# Altium PCB WIZARD_100V.PcbDoc
Units mil, origin at the board's own origin, x right, y up, seen from the top; angles counter-clockwise.
Board outline 3850 x 4000 mil, 2 copper layers (Top Layer, Bottom Layer); 59 components, 36 nets, 171 pads, 26 vias.
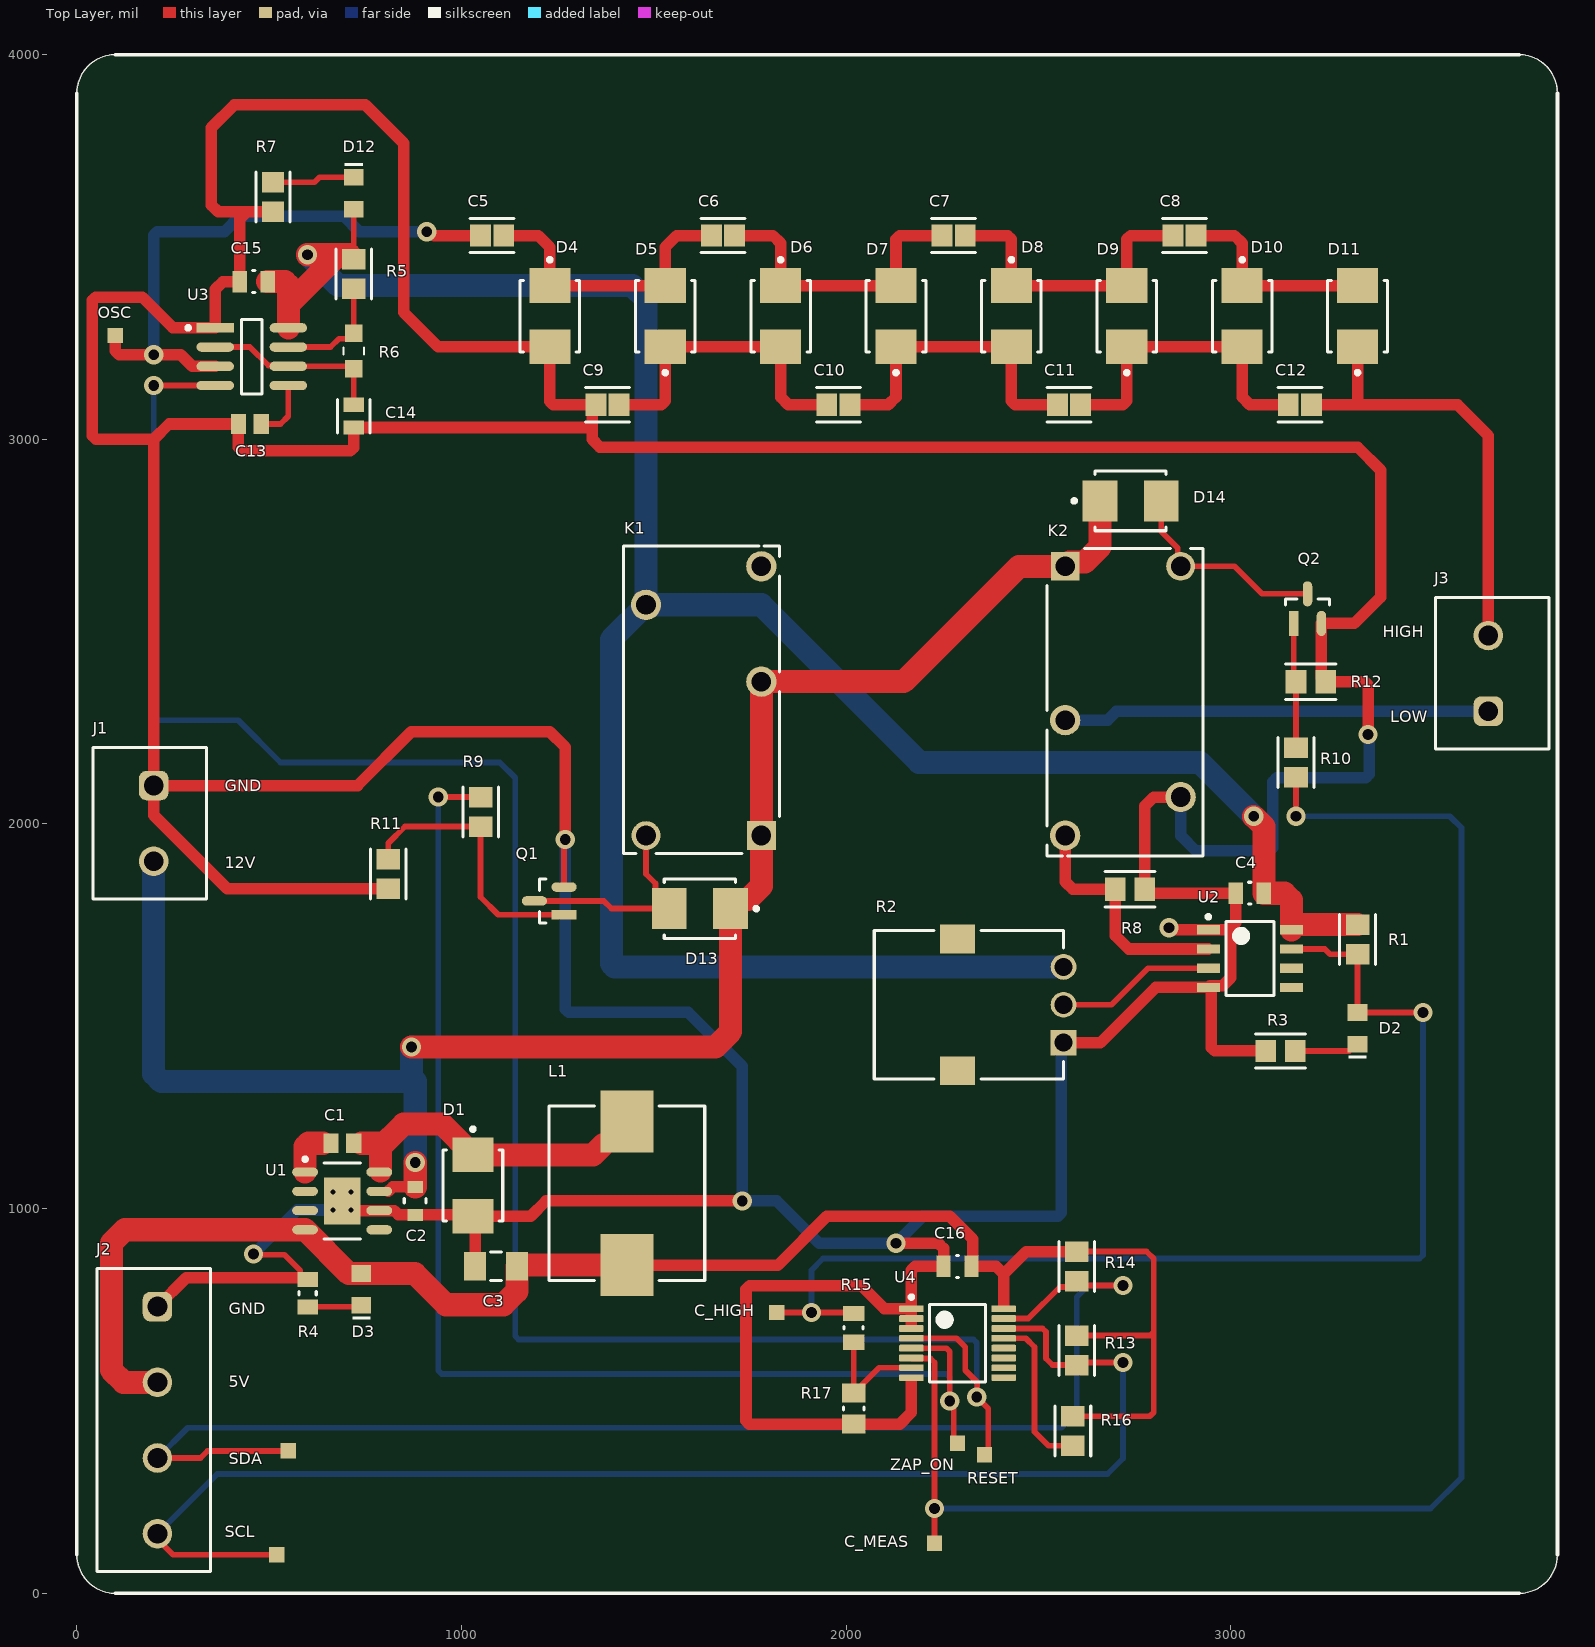
[diagram p0: Top Layer view]
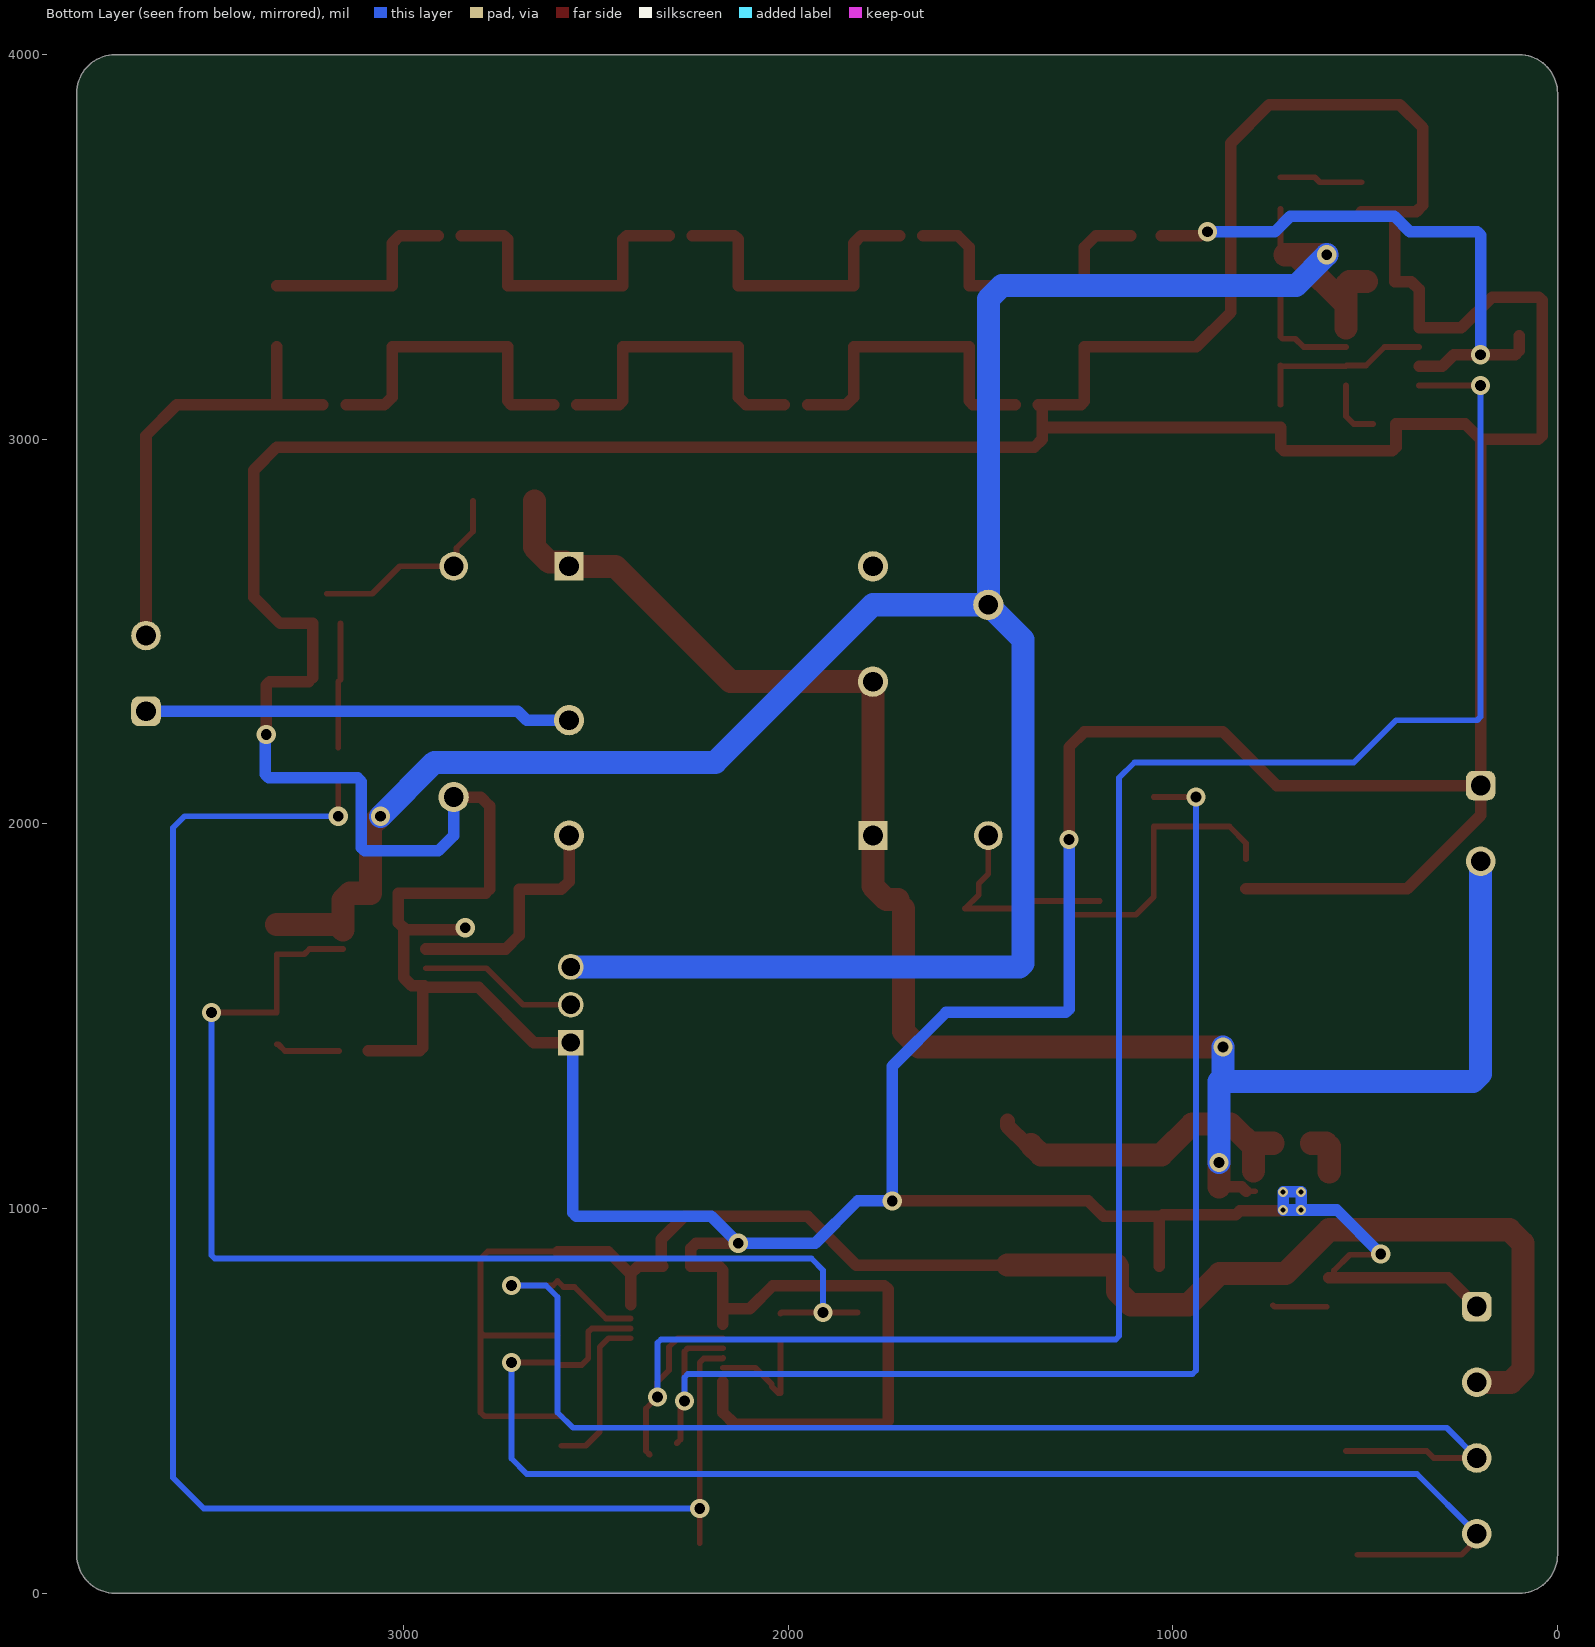
[diagram p1: Bottom Layer view, seen from below]
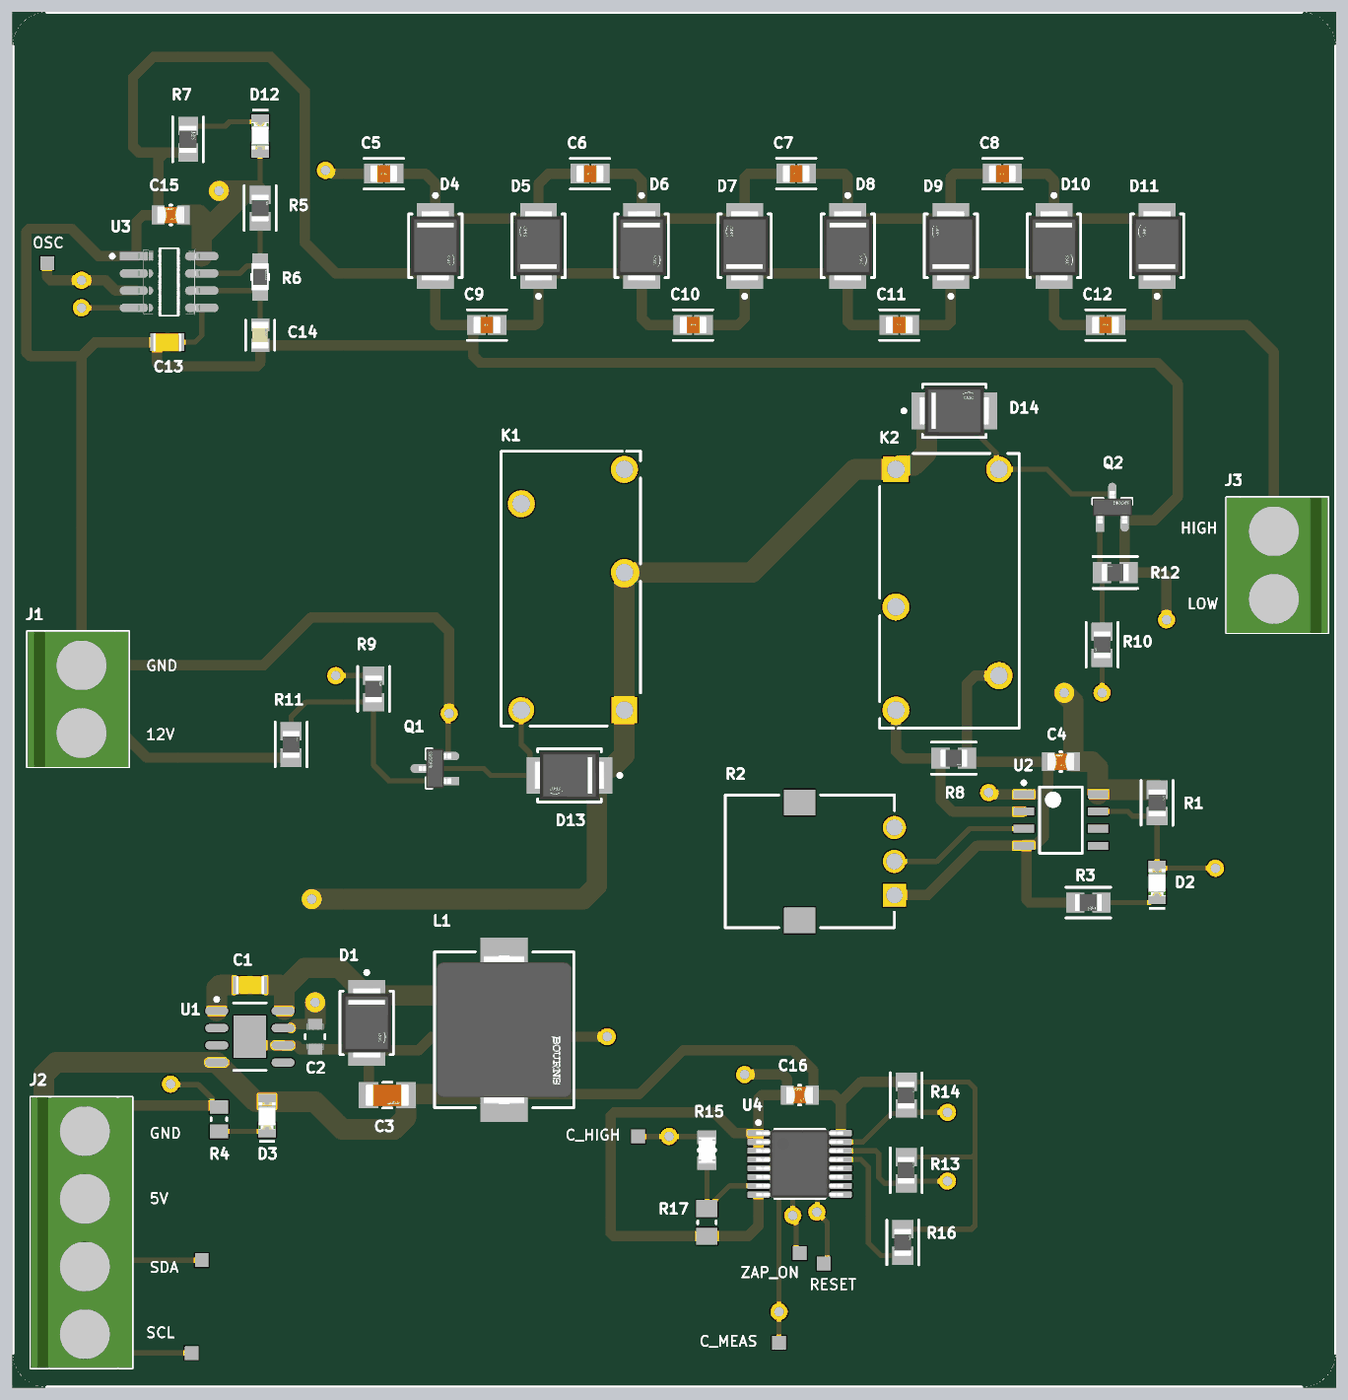
[diagram p2: 3D render of the assembled board from above, using the file's embedded part models]

## Layer stack, top to bottom
Top Solder: solder mask 0.4, Solder Resist, Dk 3.5
Top Layer: signal copper 1.4
Dielectric 1: dielectric 12.6, FR-4, Dk 4.8
Bottom Layer: signal copper 1.4
Bottom Solder: solder mask 0.4, Solder Resist, Dk 3.5

## Board outline
0,100 0,3900 cw(c100,3900) 100,4000 3750,4000 cw(c3750,3900) 3850,3900 3850,100 cw(c3750,100) 3750,0 100,0 cw(c100,100)

## Design rules (kind name [scope] priority, off if disabled: settings)
Clearance [All] p1: gap=5 ignorepadtopadclearanceinfootprint=FALSE
ComponentClearance [All] p1 off: gap=10 collisioncheckmode=3 verticalgap=10 showdistances=FALSE
DiffPairsRouting [All] p1: maxlimit=13 minlimit=13 mostfreqgap=13 toplayer_minwidth=7.42 toplayer_maxwidth=13 toplayer_prefwidth=7.42 bottomlayer_minwidth=7.42 bottomlayer_maxwidth=13 bottomlayer_prefwidth=7.42 maxuncoupledlength=500
FabricationTestPointUsage TestPointUsage [All] p1: valid=0 allowmultiple=FALSE
FabricationTestpoint Testpoint [All] p1: side=3 testpointundercomponent=TRUE minsize=40 maxsize=100 preferedsize=60 minholesize=20 maxholesize=40 preferedholesize=32 testpointgrid=1 allowsidetop=TRUE allowsidebottom=TRUE usegrid=TRUE gridtolerance=0.01
Height [All] p1 off: minheight=0 maxheight=1000 prefheight=500
HoleSize [All] p1: absolutevalues=TRUE maxlimit=800 minlimit=10 maxpercent=80.000 minpercent=20.000
MatchedLengths MatchedLengths_I210Rx [InNetClass('I210Rx')] p1: tolerance=5 checknetsindiffpair=FALSE checkdiffpairvsdiffpair=TRUE checkxsignals=TRUE checkothers=TRUE
MatchedLengths MatchedLengths_I210Tx [InNetClass('I210Tx')] p2: tolerance=5 checknetsindiffpair=FALSE checkdiffpairvsdiffpair=TRUE checkxsignals=TRUE checkothers=TRUE
MatchedLengths MatchedLengths_mSATARx [InNetClass('mSATARx')] p3: tolerance=25 checknetsindiffpair=FALSE checkdiffpairvsdiffpair=TRUE checkxsignals=TRUE checkothers=TRUE
MatchedLengths MatchedLengths_mSATATx [InNetClass('mSATATx')] p4: tolerance=25 checknetsindiffpair=FALSE checkdiffpairvsdiffpair=TRUE checkxsignals=TRUE checkothers=TRUE
MatchedLengths MatchedLengths_PCIECLK [InNetClass('PCIECLK')] p5: tolerance=25 checknetsindiffpair=FALSE checkdiffpairvsdiffpair=TRUE checkxsignals=TRUE checkothers=TRUE
MatchedLengths MatchedLengths_PCIETx [InNetClass('PCIETx')] p6: tolerance=5 checknetsindiffpair=FALSE checkdiffpairvsdiffpair=TRUE checkxsignals=TRUE checkothers=TRUE
MatchedLengths MatchedLengths_PCIERx [InNetClass('PCIERx')] p7: tolerance=5 checknetsindiffpair=FALSE checkdiffpairvsdiffpair=TRUE checkxsignals=TRUE checkothers=TRUE
MinimumSolderMaskSliver [All] p1: minsoldermaskwidth=5
PlaneConnect [All] p1: planeconnectstyle=Relief reliefexpansion=20 reliefentries=4 reliefconductorwidth=15 reliefairgap=10
PolygonConnect [All] p1: connectstyle=Direct reliefconductorwidth=20 reliefentries=4 polygonreliefangle="90 Angle" airgapwidth=30
RoutingVias [All] p1: holewidth=20 width=40 viastyle="Through Hole" minholewidth=15 minwidth=35 maxholewidth=28 maxwidth=50
SilkToSilkClearance [All] p1: silktosilkclearance=5
SilkToSolderMaskClearance SilkscreenOverComponentPads [IsPad] p1: minsilkscreentomaskgap=5 clearancetoexposedcopper=TRUE
SolderMaskExpansion [All] p1: expansion=4 istentingtop=FALSE
SupplyNets "Schematic Supply Nets_1" [InNet('+12')] p1: voltage=0.000
SupplyNets "Schematic Supply Nets" [InNet('GND')] p2: voltage=0.000
Width [All] p1: maxlimit=500 minlimit=5 preferedwidth=10
20 further rules are at their usual default settings.

## Classes and differential pairs
component class WIZARD_HV: C1 C2 C3 C4 C5 C6 C7 C8 C9 C10 C11 C12 C13 C14 C15 D1 D2 D3 D4 D5 D6 D7 D8 D9 D10 D11 D12 L1 R1 R2 R3 R4 R5 R6 R7 R8 U1 U2 U3
component class WIZARD_Control: C16 D13 D14 J1 J2 J3 K1 K2 Q1 Q2 R9 R10 R11 R12 R13 R14 R15 R16 R17 U4

## Components (designator, comment, footprint, x,y, rotation, side; value= is the part's Value field where it differs from the comment)
C1 "CL21B103KBANNNC" CAPC2013X75X45LL10T25 690.47,1170 r180 top
C2 "CGA4J3X7R1E684K125AB" FP-CGA4J-MFG 880,1020 r270 top
C3 "GRM31CR61A107MEA8L" FP-GRM31C-0_3-e0_3_0_8-IPC_B 1090,850 r0 top
C4 "CC0805KRX7R9BB104" FP-CC0805-0_85-MFG 3050,1820 r180 top value="100 nF"
C5 "C2012X7T2E104K125AA" FP-C2012-125-0_2-IPC_B 1079.92,3530 r0 top
C6 "C2012X7T2E104K125AA" FP-C2012-125-0_2-IPC_B 1679.92,3530 r0 top
C7 "C2012X7T2E104K125AA" FP-C2012-125-0_2-IPC_B 2279.92,3530 r0 top
C8 "C2012X7T2E104K125AA" FP-C2012-125-0_2-IPC_B 2879.92,3530 r0 top
C9 "C2012X7T2E104K125AA" FP-C2012-125-0_2-IPC_B 1379.92,3090 r0 top
C10 "C2012X7T2E104K125AA" FP-C2012-125-0_2-IPC_B 1979.92,3090 r0 top
C11 "C2012X7T2E104K125AA" FP-C2012-125-0_2-IPC_B 2579.92,3090 r0 top
C12 "C2012X7T2E104K125AA" FP-C2012-125-0_2-IPC_B 3179.92,3090 r0 top
C13 "CL21B103KBANNNC" CAPC2013X75X45LL10T25 450,3040 r0 top
C14 "C0805C122K5RACTU" FP-C0805C-DN-MFG 720,3060.47 r270 top value="1,200 pF"
C15 "CC0805KRX7R9BB104" FP-CC0805-0_85-MFG 460,3410 r180 top value="100 nF"
C16 "CC0805KRX7R9BB104" FP-CC0805-0_85-MFG 2290,850 r180 top value="100 nF"
D1 "SK520B" FP-SMB-MFG 1030,1060 r270 top
D2 "150080RS75000" WL-SMCW_0805_150080xx75000 3330,1468.66 r90 top
D3 "150080RS75000" WL-SMCW_0805_150080xx75000 740,790 r90 top
D4 "SK520B" FP-SMB-MFG 1230,3320.28 r270 top
D5 "SK520B" FP-SMB-MFG 1530,3320.28 r90 top
D6 "SK520B" FP-SMB-MFG 1830,3320.28 r270 top
D7 "SK520B" FP-SMB-MFG 2130,3320.28 r90 top
D8 "SK520B" FP-SMB-MFG 2430,3320.28 r270 top
D9 "SK520B" FP-SMB-MFG 2730,3320.28 r90 top
D10 "SK520B" FP-SMB-MFG 3030,3320.28 r270 top
D11 "SK520B" FP-SMB-MFG 3330,3320.28 r90 top
D12 "150080RS75000" WL-SMCW_0805_150080xx75000 720,3640 r270 top
D13 "SK520B" FP-SMB-MFG 1620,1780 r180 top
D14 "SK520B" FP-SMB-MFG 2740,2840 r0 top
J1 "691137710002" 691137710002 190.16,2001.58 r270 top
J2 "691137710004" 691137710004 200,450 r270 top
J3 "691137710002" 691137710002 3679.84,2391.57 r90 top
K1 "G5Q-14-DC12" OMRON-G5Q-14-5_V 1630,2320 r90 top
K2 "G5Q-14-DC12" OMRON-G5Q-14-5_V 2720,2320 r270 top
L1 "SRP1038A-100M" FP-SRP1038A-100M-MFG 1430,1040 r270 top
Q1 "MMBT3904-7-F" FP-SOT23-IPC_A 1228.45,1800 r180 top
Q2 "MMBT3904-7-F" FP-SOT23-IPC_A 3200,2560 r90 top
R1 "RR1220P-103-D" FP-RR1220-IPC_A 3330,1700 r90 top
R2 "P090S-14T20BR10K" RES-POT-3 2290,1530 r90 top
R3 "RMCF0805FT392R" FP-RMCF0805-IPC_A 3130,1410 r0 top
R4 "RC0805FR-07147RL" RESC2013X60X35NL10T20 600,780 r270 top value=147R
R5 "RR1220P-102-D" FP-RR1220-IPC_A 720,3430 r90 top
R6 "ERA-6AEB4992V" FP-ERA6A_MFG 720,3230 r90 top
R7 "RMCF0805FT392R" FP-RMCF0805-IPC_A 510,3630 r90 top
R8 "RR1220P-102-D" FP-RR1220-IPC_A 2738.41,1830 r0 top
R9 "RR1220P-102-D" FP-RR1220-IPC_A 1050,2031.59 r90 top
R10 "RR1220P-102-D" FP-RR1220-IPC_A 3170,2160 r270 top
R11 "RR1220P-103-D" FP-RR1220-IPC_A 810,1870 r90 top
R12 "RR1220P-103-D" FP-RR1220-IPC_A 3208.41,2370 r180 top
R13 "RR1220P-103-D" FP-RR1220-IPC_A 2600,631.59 r90 top
R14 "RR1220P-103-D" FP-RR1220-IPC_A 2600,850 r90 top
R15 "CRCW08058K25FKEA" FP-CRCW0805-e3-IPC_B 2020,690 r90 top
R16 "RR1220P-103-D" FP-RR1220-IPC_A 2590,421.59 r90 top
R17 "CRCW08055K00FKTA" RESC2013X50X30ML20T20 2020,480 r90 top value=5kR
U1 "LM22673MRE-5.0/NOPB" MRA08B_L 690,1020 r0 top
U2 "LM311DR2G" ONSC-SOIC-8-751-07_V 3050,1650 r0 top
U3 "NE555DR" FP-D0008A-IPC_A 454.98,3215 r0 top
U4 "TCA9554PWR" PW0016A_M 2290,650 r0 top

## Footprints (in the part's own frame and the unit in brackets; to place one, negate y for a bottom-side part, rotate by r counter-clockwise, add the part's x,y. Pads: shape width x height; smd on the part's side, far side on the other; paste and mask are expansions set on the pad)
691137710002 [mm] "Horizontal Cable Entry with Pressure Clamp, pitch 5mm, 02p"
  rrect50% 1.95x1.95 hole 1.3: 1(-2.5,0.25)
  round 1.95 hole 1.3: 2(2.5,0.25)
  silkscreen extent -5,-3.75 5,3.75, body extent -5,-3.75 5,3.75, height 11.6
691137710004 [mm] "Horizontal Cable Entry with Pressure Clamp, pitch 5mm, 04p"
  rrect50% 1.95x1.95 hole 1.3: 1(-7.5,0.25)
  round 1.95 hole 1.3: 2(-2.5,0.25) 3(2.5,0.25) 4(7.5,0.25)
  silkscreen extent -10,-3.75 10,3.75, body extent -10,-3.75 10,3.75, height 11.6
CAPC2013X75X45LL10T25 [mm] "Chip Capacitor, 2-Leads, Body 2.1x1.35mm, IPC High Density"
  rect 1x1.3 smd: 1(-0.75,0) 2(0.75,0)
  body extent -1.05,-0.67 1.05,0.67, height 0.75
FP-C0805C-DN-MFG [mm]
  rect 0.95x1.35 smd paste+0 mask+0: 1(-0.75,0) 2(0.75,0)
  silkscreen extent -1.1,-1.07 1.1,1.07, body extent -1.4,-0.85 1.4,0.85, height 0.25
FP-C2012-125-0_2-IPC_B [mil]
  rect 54.25x57.33 smd paste+0 mask+0: 1(-30.08,0) 2(30.08,0)
  silkscreen extent -57,-44 57,44, body extent -67,-39 67,39, height 10
FP-CC0805-0_85-MFG [mm]
  rect 0.95x1.4 smd paste+0 mask+0: 1(-0.925,0) 2(0.925,0)
  silkscreen extent -0.07,-0.73 0.07,0.73, body extent -1.6,-1.05 1.6,1.05, height 0.25
FP-CGA4J-MFG [mm]
  rect 0.8x1.05 smd paste+0 mask+0: 1(-0.925,0) 2(0.925,0)
  silkscreen extent -0.15,-0.73 0.15,0.73, body extent -1.43,-0.82 1.43,0.82, height 0.25
FP-CRCW0805-e3-IPC_B [mil]
  rect 39.63x55.44 smd paste+0 mask+0: 1(-37.44,0) 2(37.44,0)
  silkscreen extent -3,-25 3,25, body extent -67,-38 67,38, height 10
FP-D0008A-IPC_A [mil]
  rect 97.21x24.49 smd paste+0 mask+0: 1(-95.02,75)
  rrect100% 97.21x24.49 smd paste+0 mask+0: 2(-95.02,25) 3(-95.02,-25) 4(-95.02,-75) 5(95.02,-75) 6(95.02,-25) 7(95.02,25) 8(95.02,75)
  silkscreen extent -170,-97 27,97, body extent -163,-116 163,116, height 10
FP-ERA6A_MFG [mm]
  rect 1.15x1.15 smd paste+0 mask+0: 1(-1.175,0) 2(1.175,0)
  silkscreen extent -0.23,-0.67 0.23,0.67, body extent -1.85,-0.77 1.85,0.77, height 0.25
FP-GRM31C-0_3-e0_3_0_8-IPC_B [mil]
  rect 57.22x74.97 smd paste+0 mask+0: 1(-54.15,0) 2(54.15,0)
  silkscreen extent -14,-37 14,37, body extent -93,-47 93,47, height 10
FP-RMCF0805-IPC_A [mil]
  rect 53.33x57.56 smd paste+0 mask+0: 1(-38.42,0) 2(38.42,0)
  silkscreen extent -65,-45 65,45, body extent -85,-48 85,48, height 10
FP-RR1220-IPC_A [mil]
  rect 53.34x61.27 smd paste+0 mask+0: 1(-38.41,0) 2(38.41,0)
  silkscreen extent -65,-46 65,46, body extent -85,-50 85,50, height 10
FP-SMB-MFG [mm]
  rect 2.29x2.72 smd paste+0 mask+0: 1(-2.025,0) 2(2.025,0)
  silkscreen extent -3.85,-1.97 2.35,1.97, body extent -3.27,-2.07 3.27,2.07, height 0.25
FP-SOT23-IPC_A [mm]
  rect 1.659x0.627 smd paste+0 mask+0: 1(-0.977,0.915)
  rrect100% 1.659x0.627 smd paste+0 mask+0: 2(-0.977,-0.915) 3(0.977,0)
  silkscreen extent 0.23,-1.45 0.65,1.45, body extent -2.31,-1.95 2.31,1.95, height 0.25
FP-SRP1038A-100M-MFG [mm]
  rect 4.1x3.5 smd paste+0 mask+0: 1(-4.75,0) 2(4.75,0)
  silkscreen extent -5.75,-5.15 5.75,5.15, body extent -6.9,-5.25 6.9,5.25, height 0.25
MRA08B_L [mm] "SOIC, 8-Leads, Body 4.9x3.9mm, Pitch 1.27mm, Exposed Pad, IPC High Density"
  oval 1.7x0.6 smd: 1(-2.45,1.905) 2(-2.45,0.635) 3(-2.45,-0.635) 4(-2.45,-1.905) 5(2.45,-1.905) 6(2.45,-0.635) 7(2.45,0.635) 8(2.45,1.905)
  rect 2.41x3.1 smd: 9(0,0)
  silkscreen extent -2.57,-2.5 1.2,2.88, body extent -2,-2.5 2,2.5, height 1.68
OMRON-G5Q-14-5_V [mm] "Relay, 5-Leads, Body 20.3x10.3mm"
  rect 1.9x1.9 hole 1.3: 1(-8.89,-3.81)
  round 2 hole 1.3: 2(1.27,-3.81) 3(8.89,-3.81) 4(6.35,3.81)
  round 1.9 hole 1.3: 5(-8.89,3.81)
  silkscreen extent -10.07,-5 10.23,5.3, body extent -10.07,-5 10.23,5.3, height 16.2
ONSC-SOIC-8-751-07_V [mm] "SOIC, 8-Leads, Body 4.9x3.9mm, Pitch 1.27mm"
  rect 1.52x0.6 smd: 1(-2.74,1.905) 2(-2.74,0.635) 3(-2.74,-0.635) 4(-2.74,-1.905) 5(2.74,-1.905) 6(2.74,-0.635) 7(2.74,0.635) 8(2.74,1.905)
  silkscreen extent -2.86,-2.45 1.58,2.88, body extent -1.95,-2.45 1.95,2.45, height 1.75
PW0016A_M [mm] "SOP, 16-Leads, Body 5.1x4.5mm, Pitch 0.65mm, IPC Low Density"
  rrect22% 1.6x0.45 smd: 1(-3.05,2.275) 2(-3.05,1.625) 3(-3.05,0.975) 4(-3.05,0.325) 5(-3.05,-0.325) 6(-3.05,-0.975) 7(-3.05,-1.625) 8(-3.05,-2.275) 9(3.05,-2.275) 10(3.05,-1.625) 11(3.05,-0.975) 12(3.05,-0.325) 13(3.05,0.325) 14(3.05,0.975) 15(3.05,1.625) 16(3.05,2.275)
  silkscreen extent -3.17,-2.55 1.85,3.17, body extent -3.21,-2.5 3.21,2.5, height 1
RES-POT-3 [mm] "POT, 3-Leads, Body 9.8x12.5mm, Pitch 2.5mm"
  rect 1.7x1.7 hole 1.2: 1(-2.5,-7)
  round 1.7 hole 1.2: 2(0,-7) 3(2.5,-7)
  rect 1.9x2.3 smd: MP1(-4.35,0) MP2(4.35,0)
  silkscreen extent -4.9,-7 4.9,5.5, body extent -4.9,-7 4.9,5.5, height 26.8
RESC2013X50X30ML20T20 [mm] "Chip Resistor, 2-Leads, Body 2.00x1.25mm, IPC Low Density"
  rect 1.25x1.55 smd: 1(-1.025,0) 2(1.025,0)
  silkscreen extent -0.1,-0.67 0.1,0.67, body extent -1.1,-0.72 1.1,0.72, height 0.5
RESC2013X60X35NL10T20 [mm] "Chip Resistor, 2-Leads, Body 2.00x1.25mm, IPC Medium Density"
  rect 1x1.35 smd: 1(-0.9,0) 2(0.9,0)
  silkscreen extent -0.1,-0.58 0.1,0.58, body extent -1.05,-0.67 1.05,0.67, height 0.6
WL-SMCW_0805_150080xx75000 [mm] "SMD Mono-color Chip LED, body 2.0x1.25mm"
  rect 1.1x1.3 smd: 1(-1.05,0) 2(1.05,0)
  silkscreen extent -2,-0.6 -1.8,0.6, body extent -1,-0.63 1,0.62, height 0.7

## Part data
C1 C13: library part CMP-2000-06105-1, "Multilayer Ceramic Capacitor, 10 nF, 50 V, -55 to 125 degC, 2-Pin SMD, RoHS, Tape and Reel", Capacitance=10000pF, Case Size/Dimension=0805, Dielectric=X7R, Manufacturer="Samsung Electro-Mechanics", Package Description="2-Pin Surface Mount Device, Body 2 x 1.25 mm", Rated Voltage=50V, Tolerance (%)=±10%, Datasheet URL=https://datasheet.ciiva.com/29199/455082-da-01-en-vs-kondensator-0805-29199459.pdf, Datasheet Version=11/2010, Manufacturer URL=http://www.samsungsem.com/global/index.jsp, Mounting Technology=SurfaceMount, Package Reference=0805
C2: library part CMP-08246-002437-1, "Cap Ceramic 680nF 25V X7R 10% Pad SMD 0805 +125°C Automotive T/R", Capacitance=680nF, Case Code (Imperial)=0805, Case Code (Metric)=2012, Dielectric=X7R, Max Operating Temperature=125°C, Min Operating Temperature=-55°C, Package Quantity=2000, Ratings=AEC-Q200, Tolerance=10%, Voltage Rating=25V, Case/Package=0805, Composition=Ceramic, Depth=1.25mm, Height=1.25mm, Lead Free="Lead Free", Length=2mm, Mount="Surface Mount", Packaging="Tape and Reel", REACH SVHC="No SVHC", Termination=SMD/SMT, Thickness=0.057inch, Voltage Rating (DC)=25V, Weight=0.000194oz, Width=0.049inch
C3: library part CMP-06035-033997-1, "Chip Multilayer Ceramic Capacitors for General Purpose, 1206, 100uF, X5R, 15%, 20%, 10V", Parameter 1=100uF
C4 C15 C16: library part CMP-2100-03606-3, "CAP CER 0.1UF 50V X7R 0805", Capacitance="100 nF", Manufacturer=Yageo, Package=CC0805-0.85, Temperature="-30°C to +85°C", Temperature Characteristic=X7R, Temperature Range High=+85°C, Temperature Range Low=-30°C, Tolerance=0.1, Voltage Rating="50 V", Automotive=No, Category=Cap, ComponentLink2Description=Datasheet, ComponentLink2URL=http://www.yageo.com/documents/recent/UPY-GPHC_Y5V_6.3V-to-50V_8.pdf, Device Class L1="Passive Components", Device Class L2=Capacitors, Device Class L3="Ceramic Capacitors", Digikey Description="CAP CER 0.1UF 50V X7R 0805", Footprint Url=http://www.yageo.com/exep/pages/download/literatures/UPY-C_GEN_24.pdf, Height=0.95mm, Ipc Land Pattern Name=CAPC200125X85, Lead Free=Yes, Manufacturer Part Number=CC0805KRX7R9BB104, Material=Ceramic, Mouser Description="Multilayer Ceramic Capacitors MLCC - SMD/SMT 100nF 50V X7R 10%", Octopart=https://octopart.com/cc0805krx7r9bb104-yageo-192993, RoHS=TRUE
C5 C6 C7 C8 C9 C10 C11 C12: library part CMP-08246-006438-1, "Multilayer Ceramic Capacitors 100nF ±10% 250V X7T SMD 0805", Capacitance=100nF, Case Code (Imperial)=0805, Case Code (Metric)=2012, Dielectric=X7T, Max Operating Temperature=125°C, Min Operating Temperature=-55°C, Package Quantity=1, Tolerance=10%, Voltage Rating=250V, Case/Package=0805, Construction=Flat, Depth=1.25mm, Height=1.25mm, Lead Free="Lead Free", Length=2mm, Mount="Surface Mount", Packaging="Tape and Reel", Radiation Hardening=No, REACH SVHC="No SVHC", RoHS Compliant=Yes, Series=C, Thickness=0.057inch, Voltage Rating (DC)=250V, Width=0.049inch
C14: library part CMP-2007-00286-2, "CAP CER 1200PF 50V 10% X7R 0805", Capacitance="1,200 pF", Manufacturer=KEMET, Package=C0805C-DN, Temperature="-55°C to +125°C", Temperature Characteristic=X7R, Temperature Coefficient=30ppm/°C, Temperature Range High=+125°C, Temperature Range Low=-55°C, Tolerance=0.1, Voltage Rating="50 V", Automotive=No, Category=Cap, ComponentLink2Description=Datasheet, ComponentLink2URL=https://content.kemet.com/datasheets/KEM_C1003_C0G_SMD.pdf, Device Class L1="Passive Components", Device Class L2=Capacitors, Device Class L3="Ceramic Capacitors", Digikey Description="CAP CER 1200PF 50V 10% X7R 0805", Height=0.88mm, Ipc Land Pattern Name=CAPC200125X78, Lead Free=Yes, Manufacturer Part Number=C0805C122K5RACTU, Material=Ceramic, Mouser Description="Cap Ceramic 0.0012uF 50V X7R 10% SMD 0805 125C Plastic T/R", Octopart=https://octopart.com/c0805c122k5ractu-kemet-8370191, RoHS=TRUE
D1 D4 D5 D6 D7 D8 D9 D10 D11 D13 D14: library part CMP-10078-124483505-1, "SK520B Diode Schottky 200V 5A Smb", Capacitance=140pF, Case/Package=SMB, Forward Current=5A, Max Forward Surge Current (Ifsm)=110A, Max Junction Temperature (Tj)=150°C, Max Repetitive Reverse Voltage (Vrrm)=200V, Min Operating Temperature=-55°C, Peak Reverse Current=200nA, Height=2.6mm, Max Operating Temperature=150°C, NexarPartId=124483505, Reverse Voltage=200V
D2 D3 D12: library part CMP-1426-00011-3, "LED Uni-Color Red 630nm 2-Pin Chip 0805(2012Metric) T/R", Case Code (Imperial)=0805, Case Code (Metric)=2012, Color=Red, Forward Current=100mA, Forward Voltage=2V, Max Junction Temperature (Tj)=95°C, Max Operating Temperature=85°C, Max Reverse Voltage (DC)=5V, Min Operating Temperature=-40°C, Power Dissipation=72mW, Test Current=20mA, Case/Package=0805, Dominant Wavelength=625nm, Height=700µm, Length=2mm, Lens Style="Clear, Rectangular", Luminous Intensity=150mcd, Mount="Surface Mount", Packaging="Tape and Reel", Peak Wavelength=630nm, REACH SVHC=Unknown, RoHS=Compliant, Viewing Angle=140°, Wavelength=625nm, Width=1.25mm
J1 J3: library part CMP-1502-03324-2, Current Rating=16A, Max Operating Temperature=120°C, Min Operating Temperature=-30°C, Voltage Rating=300V, Contact Material="Nickel, Tin", Height=11.6mm, Lead Pitch=5mm, NexarPartId=78871135, Number of Contacts=2, Number of Pins=2, Number of Rows=1, Packaging=Box, RoHS=Non-Compliant
J2: library part CMP-1502-03326-2, Lead Pitch=5mm, NexarPartId=78871140, Number of Pins=4, Packaging=Box, RoHS=Non-Compliant
K1 K2: library part CMP-2000-06307-2, "A Miniature Power Relay with 1-Pole 10 A Switching Capacity, 12 V, 33.3 mA, -40 to 105 degC, 5-Pin THD, RoHS, Bulk", Coil Current=33.3mA, Coil Resistance=360Ohm, Coil Voltage=12V, Manufacturer="Omron Electronic Components", Package Description="5-Pin Through Hole Device, Body 20 x 10 mm", Package Reference=G5Q-14-5, PartNumber=G5Q, Power Rating=0.4W, Contact Form=SPDT, Contact Material=SilverAlloy, Current Rating=33.3mA, Datasheet URL=https://www.omron.com/ecb/products/pdf/en-g5q.pdf, Datasheet Version=03/2016, Manufacturer URL=http://www.omron.com/, Mounting Style=ThroughHole, Mounting Technology=ThroughHole, Package URL=https://www.omron.com/ecb/products/pdf/en-g5q.pdf
L1: library part CMP-07248-000083-1, "FIXED IND 10UH 7.5A 30 MOHM SMD", Case/Package=Nonstandard, Current Rating=7.5A, DC Resistance (DCR)=30mR, Inductance=10uH, Inductance Tolerance=20%, Max Operating Temperature=150°C, Min Operating Temperature=-40°C, Package Quantity=500, Ratings=AEC-Q200, Resistor Type=Wirewound, Saturation Current=12A, Self Resonant Frequency=10MHz, Test Frequency=100kHz, Core Material="Carbonyl Powder", DC Current=7.5A, Depth=10.3mm, Height=3.8mm, Height - Seated (Max)=0.157inch, Length=11mm, Max DC Current=7.5A, Military Standard=Not, Mount="Surface Mount", Packaging="Tape and Reel", Q Factor=20, REACH SVHC="No SVHC", RMS Current (Irms)=7.5A, RoHS Compliant=Yes, Shielding=Shielded, Termination=SMD/SMT, Tolerance=20%, Width=0.394inch
Q1 Q2: library part CMP-2000-04931-2, "TRANS NPN 40V 0.2A SMD SOT23-3", Case/Package=SOT-23, Collector Base Voltage (VCBO)=60V, Collector Emitter Breakdown Voltage=40V, Collector Emitter Saturation Voltage=300mV, Continuous Collector Current=200mA, Emitter Base Voltage (VEBO)=6V, Frequency=300MHz, Max Operating Temperature=150°C, Max Power Dissipation=300mW, Min Operating Temperature=-55°C, Package Quantity=3000, Power Dissipation=350mW, Collector Emitter Voltage (VCEO)=40V, Contact Plating=Tin, Element Configuration=Single, Gain Bandwidth Product=300MHz, Height=1mm, hFE Min=100, Lead Free="Lead Free", Length=3.05mm, Max Breakdown Voltage=40V, Max Collector Current=200mA, Max Frequency=300MHz, Mount="Surface Mount", Number of Elements=1, Number of Pins=3, Packaging="Tape and Reel", Polarity=NPN, Radiation Hardening=No, REACH SVHC="No SVHC", Transition Frequency=300MHz, Voltage Rating (DC)=40V, Weight=0.000282oz, Width=1.4mm
R1 R11 R12 R13 R14 R16: library part CMP-2001-03215-2, "10kΩ ±0.5% 0.1W 1/10W Chip Resistor 0805 (2012 Metric) Thin Film", Case Code (Imperial)=0805, Case Code (Metric)=2012, Max Operating Temperature=125°C, Max Power Dissipation=100mW, Min Operating Temperature=-55°C, Package Quantity=1, Resistance=10kR, Resistance Tolerance=0.5%, Resistor Type="Thin Film", Temperature Coefficient=25ppm/°C, Voltage Rating=100V, Case/Package=0805, Depth=1.25mm, Height=0.4mm, Lead Free="Lead Free", Length=2mm, Number of Terminations=2, Packaging="Tape and Reel", Power Rating=100mW, RoHS Compliant=Yes, Series=RR, Size Code=0805, Technology="THIN FILM", Termination=SMD/SMT, Tolerance=0.5%, Voltage Rating (DC)=100V, Weight=0.000194oz, Width=1.25mm
R2: library part CMP-2000-06871-1, "9 mm Rotary Potentiometer, Insulated Shaft, Conductive Plastic Element, 10 KOhm, -20 to 70 degC, 3-Pin THD, RoHS, Tray", Manufacturer="BI Technologies", Package Description="POT, 3-Leads, Body 9.8 x 12.5 mm, Pitch 2.5 mm", Package Reference=POT-3, Power (Watts)=0.03W,1/32W, Power Rating=0.03W, Resistance (Ohms)=10k, Resistive Material=ConductivePlastic, Standard Package=1, Temperature Coefficient=-, Tolerance=±20%, Actuator Diameter="0.236\"(6.00mm)", Actuator Length="0.787\"(20.00mm)", Actuator Type=Knurled, Adjustment Type=TopAdjustment, Built in Switch=Detent, Bushing Thread=-, Category=Potentiometers,VariableResistors, Datasheet URL=http://www.bitechnologies.com/pdfs/p090.pdf, Datasheet Version=07/2008, Family=RotaryPotentiometers,Rheostats, Manufacturer URL=http://www.bi-technologies.net/, Mounting Technology=ThroughHole, Mounting Type=ThroughHole, Number of Gangs=1, Number of Turns=1, Online Catalog=P090Series, Other Names=987-1277P090S14T20BR10K, Package URL=http://www.bitechnologies.com/pdfs/p090.pdf, Packaging=Tray, Rotation=280°, Series=P090, Taper=Linear, Termination Style=PCBPins,BoardLocks
R3 R7: library part CMP-26527-007282-1, "392Ω ±1% 0.125W 0805 Thick Film Chip Resistor AEC-Q200 compliant", Case Code (Imperial)=0805, Case Code (Metric)=2012, Max Operating Temperature=155°C, Max Power Dissipation=125mW, Min Operating Temperature=-55°C, Resistance=392R, Resistor Type="Thick Film", Temperature Coefficient=100ppm/°C, Tolerance=1%, Case/Package=0805, Construction=Rectangular, Contact Plating=Tin, Depth=1.25mm, Features="Automotive AEC-Q200", Height=0.026inch, Lead Free="Lead Free", Length=0.079inch, Military Standard=Not, Mount="Surface Mount", Number of Terminations=2, Packaging="Tape and Reel", Power Rating=125mW, Radiation Hardening=No, RoHS Compliant=Yes, Series=RMCF, Size Code=0805, Width=0.049inch
R4: library part CMP-2001-00922-1, Manufacturer=Yageo, Part Number=RC0805FR-07147RL
R5 R8 R9 R10: library part CMP-2001-03210-2, "1kΩ ±0.5% 0.1W 1/10W Chip Resistor 0805 (2012 Metric) Thin Film", Case Code (Imperial)=0805, Case Code (Metric)=2012, Max Operating Temperature=125°C, Max Power Dissipation=100mW, Min Operating Temperature=-55°C, Package Quantity=1, Resistance=1kR, Resistance Tolerance=0.5%, Resistor Type="Thin Film", Temperature Coefficient=25ppm/°C, Voltage Rating=100V, Case/Package=0805, Depth=1.25mm, Height=0.4mm, Lead Free="Lead Free", Length=2mm, Number of Terminations=2, Packaging="Tape and Reel", Power Rating=100mW, RoHS Compliant=Yes, Series=RR, Size Code=0805, Technology="THIN FILM", Termination=SMD/SMT, Tolerance=0.5%, Voltage Rating (DC)=100V, Width=1.25mm
R6: library part CMP-2001-00839-2, "Res Thin Film 0805 49.9K Ohm 0.1% 0.125W(1/8W) +/-25ppm/ßC SMD Automotive T/R", Case Code (Imperial)=0805, Case Code (Metric)=2012, Max Operating Temperature=155°C, Max Power Dissipation=125mW, Min Operating Temperature=-55°C, Resistance=49.9kΩ, Temperature Coefficient=25ppm/°C, Tolerance=0.1%, Voltage Rating=100V, Case/Package=0805, Composition="Metal Film, Thin Film", Contact Plating=Tin, Depth=1.25mm, Features="Automotive AEC-Q200", Height=500µm, Lead Free="Lead Free", Length=2mm, Lifecycle Status=Production, Military Standard=Not, Mount="Surface Mount", Number of Pins=2, Number of Terminations=2, Packaging="Cut Tape", Power Rating=125mW, Radiation Hardening=No, REACH SVHC=Unknown, RoHS=Compliant, Schedule B="8533210045, 8533210045", Termination=SMD/SMT, Voltage Rating (DC)=100V, Weight=5.499807mg
R15: library part CMP-2001-04150-2, "RES Thick Film, 8.25kΩ, 1%, 0.125W, 100ppm/°C, 0805", Case Code (Imperial)=0805, Case Code (Metric)=2012, Max Operating Temperature=155°C, Max Power Dissipation=125mW, Min Operating Temperature=-55°C, Package Quantity=5000, Resistance=8.25kR, Resistance Tolerance=1%, Resistor Type="Thick Film", Temperature Coefficient=100ppm/°C, Voltage Rating=150V, Case/Package=0805, Construction=Rectangular, Contact Plating=Tin, Depth=1.25mm, Features="Automotive AEC-Q200", Height=0.45mm, Lead Free="Lead Free", Length=2mm, Military Standard=Not, Number of Terminations=2, Packaging="Tape and Reel", Power Rating=125mW, Radiation Hardening=No, RoHS Compliant=Yes, Series=CRCW, Size Code=0805, Technology="THICK FILM", Termination=SMD/SMT, Tolerance=1%, Voltage Rating (DC)=150V, Weight=0.000194oz, Width=1.25mm
R17: library part CMP-2001-04239-1, Manufacturer="Vishay Dale", Part Number=CRCW08055K00FKTA
U1: library part CMP-0069-00738-2, "3A SIMPLE SWITCHER®, Step-Down Voltage Regulator with Adjustable Soft-Start and Current Limit, 8-pin PSOP, Pb-Free", Manufacturer="National Semiconductor", PackageTopMarking=NSXYTT*L22673*5.0, PowerWise=N, Code_JEDEC=MS-012-AA, ComponentLink1Description="LM22673 Datasheet", ComponentLink1URL=http://www.national.com/ds/LM/LM22673.pdf, ComponentLink2Description="LM22673 Web Page", ComponentLink2URL=http://www.national.com/pf/LM/LM22673.html, ComponentLink3Description="MRA08B Package Page", ComponentLink3URL=http://www.national.com/packaging/folders/mra08b.html, CompType=Switcher, DatasheetVersion=Nov-2008, PackageDescription="Molded, PSOP .193 x .154 x .058in, 8 Lead, .050in Pitch, Large DAP", PackageReference=MRA08B, PackageVersion="revB, Dec-2007", PinCount=8, RevisionNote="Component URLs added", RoHS=Y
U2: library part CMP-1305-00058-1, "Single Comparator, 5 to 30 V, 0 to 70 degC, 8-Pin SOIC, Pb-Free, Tape and Reel", Manufacturer="On Semiconductor", ComponentLink1Description="Manufacturer URL", ComponentLink1URL=http://www.onsemi.com/, ComponentLink2Description=Datasheet, ComponentLink2URL=http://www.onsemi.com/pub_link/Collateral/LM211-D.PDF, ComponentLink3Description="Package Specification", ComponentLink3URL=http://www.onsemi.com/pub_link/Collateral/751-07.PDF, DatasheetVersion="Rev. 6", ICC Typ (mA)=2.4, Mounting Technology="Surface Mount", PackageDescription="8-Pin Small Outline Integrated Circuit, Body 4.9 x 3.9 mm, Pitch 1.27 mm", PackageReference=SOIC-8-751-07, PackageVersion="Rev. AK, 02/2011", Packing="Tape and Reel", PartNumber=LM311DR2G, RoHS=TRUE, VCC Max (V)=30, VCC Min (V)=5
U3: library part CMP-1685-00007-2, "IC OSC SGL TIMER 100KHZ 8-SOIC", Case/Package=SOIC, Frequency=100kHz, High Level Output Current=-200mA, Low Level Output Current=200mA, Max Operating Temperature=70°C, Max Supply Voltage=16V, Min Operating Temperature=0°C, Min Supply Voltage=4.5V, Operating Supply Current=10mA, Package Quantity=2500, Quiescent Current=15mA, Contact Plating=Gold, Height=1.58mm, Lead Free="Lead Free", Length=4.9mm, Mount="Surface Mount", Number of Pins=8, Number of Timers/Counters=1, Packaging="Tape and Reel", Radiation Hardening=No, REACH SVHC="No SVHC", Weight=0.002561oz, Width=3.91mm
U4: library part CMP-0314-00246-2, "Remote 8-Bit I2C and SMBus I/O Expander, 1.65 to 5.5 V, -40 to 85 degC, 16-pin TSSOP (PW), Green (RoHS & no Sb/Br)", 5V Tolerant I/O=Yes, Manufacturer="Texas Instruments", Max Frequency(kHz)=400, # of I/Os=8, Code_JEDEC=MO-153, ComponentLink1Description=Datasheet, ComponentLink1URL=http://www.ti.com/general/docs/lit/getliterature.tsp?genericPartNumber=TCA9554&fileType=pdf, Configuration Registers=Yes, DatasheetVersion=SCPS233, Eco-Plan="Green (RoHS & no Sb/Br)", fSCLK(Max)(MHz)=401, I2C Address=0100xxx, Interrupt Output=Yes, Low Power=Yes, Mounting Technology="Surface Mount", PackageDescription="16-Pin Plastic Thin Small Outline Package 5 x 4.4 mm Body ,0.65 mm Pitch", PackageReference=PW0016A, PackageVersion="revG, Feb-2011", PartNumber=TCA9554PWR, SubFamily="I2C IO Expander", Vcc range(V)="1.65 to 5.5", VCC(Max)(V)=5.5, VCC(Min)(V)=1.65

## Free pads (board coordinates)
  rect 40x40 smd: 2(100,3270) 2(520,100) 2(550,370) 2(1820,730) 2(2230,130) 2(2290,390) 2(2360,360)

## Via types
v1: diameter 50, hole 28, Top Layer to Bottom Layer, 22 vias
v2: diameter 25.98, hole 12.99, Top Layer to Bottom Layer, tented top, 4 vias

## Nets (pads, with @x,y where several pads share a name; then routed paths per layer and width w, separated by ;. In a path a pad name is that pad's centre, name@x,y a point inside that pad or via, vN(x,y) a via of type N, cw(c..) or ccw(c..) an arc to the next point about the centre after c; other vN are vias at no path point)
5\5\5\R\E\S\E\T\: pad.2@2360,360 U3.4 U4.4 | length 5286.3
  Top Layer w15: v1(200,3140) U3.4 ; U4.4 2287.2,662.8 2310,640 2310,580 2341.41,548.59 2341.41,511.41 v1(2340,510) 2370,480 2370,370 pad.2@2360,360
  Bottom Layer w15: v1(200,3140) 200,2278.79 208.79,2270 420,2270 530,2160 1100,2160 1140,2120 1140,668.79 1148.79,660 2331.21,660 2340,651.21 v1(2340,510)
5V: C3.2 C16.1 D3.2 J2.2 L1.2 R13.2 R14.2 R16.2 U1.4 U4.16 | length 4439.3
  Top Layer w15: C3.2 C3.2@1147.14,852.99 ; C16.1 C16.1@2330,853.58 ; R16.2 2790,460 2800,470 2800,678.79 ; R13.2 2791.21,670 2800,678.79 ; R14.2 2781.59,888.41 2800,870 2800,678.79
  Top Layer w30: D3.2@739.77,831.11 D3.2 ; L1.2 1822.99,852.99 1950,980 2270,980 2330,920 C16.1@2330,853.58 ; C16.1 2390,850 2410.08,829.92 ; 2410.08,750 2410.08,829.92 ; R14.2 2468.57,888.41 2410.08,829.92
  Top Layer w60: J2.2 121.57,548.43 90,580 90,909.85 125.15,945 U1.4 707.43,831.11 D3.2@739.77,831.11 ; D3.2 878.66,831.34 960,750 1109,750 1144.15,785.15 C3.2 ; C3.2@1147.14,852.99 1170,852.99 L1.2
12V_IN: C4.1 C15.1 D12.2 K1.4 R1.2 R2.3 R5.2 U2.8 U3.8 | length 6875.2
  Top Layer w15: R5.2@708.41,3480 718.02,3470.39 R5.2 D12.2
  Top Layer w60: C15.1 541.21,3410 550,3401.21 550,3350 ; v1(600,3480) 668.41,3480 R5.2@708.41,3480 ; 668.41,3468.41 550,3350 ; v1(3060,2020) 3086.42,1993.58 C4.1 3140,1820 3157.87,1802.13 U2.8 3171.29,1738.41 R1.2 ; 550,3350 U3.8 550,3350
  Bottom Layer w60: v1(600,3480) 680,3400 1444.85,3400 1480,3364.85 K1.4 ; R2.3 1398.79,1628.43 1390,1637.21 1390,2480 K1.4 ; v1(3060,2020) 2920,2160 2190,2160 1780,2570 K1.4
+12: C2.1 D13.1 D14.1 J1.2 K1.1 K1.2 K2.1 U1.7 | length 4693.6
  Top Layer w15: U1.7 U1.7@809.79,1045 ; D13.1@1700,1779.72 D13.1 1699.72,1788.46 1714.8,1803.54 D13.1@1737.3,1826.04 ; K2.1 K2.1@2581.11,2681.11 ; D14.1@2660,2839.72 D14.1
  Top Layer w30: U1.7@809.79,1045 821.21,1056.42 C2.1
  Top Layer w60: v1(870,1420) 1660,1420 1700,1460 D13.1@1700,1779.72 ; C2.1 v1(880,1120) ; D13.1@1714.8,1803.54 1744.85,1803.54 1780,1838.69 K1.1 K1.2 2150,2370 2450,2670 K2.1 ; K2.1@2581.11,2681.11 2621.11,2681.11 2660,2720 D14.1@2660,2839.72
  Bottom Layer w15: 870,1340 870,1331.21 871.21,1330
  Bottom Layer w60: J1.2 200,1350 220,1330 871.21,1330 ; v1(870,1420) 870,1340 880,1330 v1(880,1120)
CURRENT_HIGH: D2.2 pad.2@1820,730 R1.1 R15.2 U2.7 | length 3047.6
  Top Layer w15: pad.2@1820,730 v1(1910,730) 2017.44,730 R15.2 ; U2.7 3245,1675 3258.41,1661.59 R1.1 D2.2 v1(3500,1510)
  Bottom Layer w15: v1(1910,730) 1910,840 1940,870 3491.21,870 3500,878.79 v1(3500,1510)
CURRENT_MEASURE: pad.2@2230,130 R10.2 U4.6 | length 4172
  Top Layer w15: U4.6 2171.28,610.26 2199.89,610.26 2200.14,610 2220,610 2230,600 v1(2230,220) pad.2@2230,130 ; v1(3170,2020) R10.2
  Bottom Layer w15: v1(2230,220) 3520,220 3600,300 3600,1990 3570,2020 v1(3170,2020)
GND: C2.2 C3.1 C4.2 C9.1 C13.1 C14.2 C15.2 C16.2 D1.2 D4.2 J1.1 J2.1 K2.4 Q1.2 Q2.2 R2.1 R3.1 R4.1 R7.1 R8.2 R11.1 R12.1 R17.1 U1.6 U1.9 U2.1 U2.4 U3.1 U4.1 U4.2 U4.3 U4.8 | length 20084.5
  Top Layer w15: U3.1 U3.1 ; C13.1@420,3039.53 C13.1 ; v1(459.39,882.2) 461.6,880 540,880 580.93,839.07 580.93,827.62 588.54,820 593.11,815.43 R4.1 R4.1@595.43,820 ; v2(713.62,996.38) U1.9@715,995 ; U1.6 U1.6@787.27,994.18 ; D1.2@1026.69,983.58 D1.2 1035.85,974.42 D1.2@1041.43,980 ; Q1.2 1266.91,1956.91 v1(1270,1960) ; U4.1@2169.64,740 2170,739.64 U4.1 ; R8.2 R8.2@2786.82,1820 ; v1(2840,1730) v1@2845,1725 ; U2.4 U2.4@2946.44,1579.31 ; 2995,1725 3000,1720 ; R12.1@3236.02,2380.8 R12.1
  Top Layer w30: J2.1 284.57,820 588.54,820 R4.1@595.43,820 ; U3.1 250,3290 170,3370 48.79,3370 40,3361.21 40,3010 50,3000 200,3000 ; U3.1 360,3390 380,3410 C15.2 423.58,3573.58 441.58,3591.58 ; C13.1@420,3039.53 420,2980 430,2970 711.21,2970 720,2978.79 C14.2 1330.94,3030.94 1340,3040 ; C13.1 240,3040 200,3000 ; R7.1 441.58,3591.58 ; U1.9@715,995 U1.6 ; U1.6@787.27,994.18 825.82,994.18 836.42,983.58 C2.2 D1.2@1026.69,983.58 ; R11.1 391.07,1831.59 200,2022.65 J1.1 ; C3.1 D1.2@1035.85,974.42 ; D1.2@1041.43,980 1180,980 1220,1020 v1(1730,1020) ; v1(1270,1960) 1270,2200 1230,2240 870,2240 730,2100 J1.1 ; v1(2130,910) 2240,910 2253.58,896.42 C16.2 2180,850 2170,840 U4.1@2170,739.64 ; U4.1@2169.64,740 2100,740 2040,800 1750,800 1740,790 1740,448.43 1748.79,439.65 R17.1 2139.65,439.65 2169.92,469.92 2169.92,550 ; 2169.92,700 U4.2 U4.1 ; R2.1 2661.57,1431.57 2805,1575 U2.4 ; R8.2 2776.82,2046.82 2800,2070 K2.4 ; R8.2@2786.82,1820 C4.2 3013.58,1743.58 2995,1725 U2.1 v1@2845,1725 ; U2.4@2946.44,1579.31 2979.31,1579.31 3000,1600 3000,1720 ; U2.4@2950,1570.69 2950,1418.79 2958.79,1410 R3.1 ; R12.1@3236.02,2380.8 Q2.2 3321.55,2521.55 3390,2590 3390,2920 3330,2980 1360,2980 1340,3000 1340,3040 ; R12.1 3348.71,2370 3357.5,2361.21 v1(3357.5,2232.5) ; J1.1 200,3000 ; 441.58,3591.58 367.57,3591.58 350,3609.16 350,3810 410,3870 750,3870 850,3770 850,3330 939.45,3240.55 D4.2 1230,3098.79 1238.79,3090 C9.1 1340,3080.16 1340,3040
  Bottom Layer w15: R2.1@2560,1425.98 R2.1 ; v1(3357.5,2232.5) v1@3360,2230
  Bottom Layer w30: v1(459.39,882.2) 573.57,996.38 v2(666.38,996.38) ; v1(1270,1960) 1270,1518.79 1278.79,1510 1590,1510 1730,1370 v1(1730,1020) 1820,1020 1930,910 v1(2130,910) 2200,980 2551.21,980 2560,988.79 R2.1@2560,1425.98 ; K2.4 2870,1970 2910,1930 3101.21,1930 3110,1938.79 3110,2110 3120,2120 3351.21,2120 3360,2128.79 v1@3360,2230 ; v2(666.38,996.38) v2(713.62,996.38) v2(713.62,1043.62) v2(666.38,1043.62) v2(666.38,996.38)
HIGH_ELECTRODE: C12.2 D11.1 J3.2 | length 1167.3
  Top Layer w30: C12.2 3321.21,3090 ; D11.1 3330,3098.79 3321.21,3090 ; J3.2 3670,3010 3590,3090 3321.21,3090
LOW_ELECTRODE: J3.1 K2.2 | length 1109.6
  Bottom Layer w30: K2.2 2680,2270 2703.15,2293.15 J3.1
NetC1_1: C1.1 D1.1 L1.1 U1.8 | length 937.4
  Top Layer w15: U1.8 U1.8@790,1098.54 ; L1.1@1388.9,1174.09 1430,1215.2 L1.1
  Top Layer w40: L1.1@1369.29,1166.3 1381.1,1166.3 1430,1215.2 L1.1
  Top Layer w60: 740,1170 781.21,1170 790,1161.21 U1.8@790,1098.54 ; 786.46,1156.46 850,1220 949.72,1220 D1.1 1342.72,1139.72 L1.1@1369.29,1166.3
NetC1_2: C1.2 U1.1 | length 116.3
  Top Layer w60: U1.1 593.54,1161.21 602.33,1170 640,1170
NetC5_2: C5.2 C6.1 D4.1 D5.2 | length 764.7
  Top Layer w30: C5.2 1200,3530 1230,3500 D4.1 D5.2 1530,3500 1560,3530 C6.1
NetC6_2: C6.2 C7.1 D6.1 D7.2 | length 782.3
  Top Layer w30: C6.2 1810,3530 1830,3510 D6.1 D7.2 2130,3520 2140,3530 C7.1
NetC7_2: C7.2 C8.1 D8.1 D9.2 | length 788.1
  Top Layer w30: C7.2 2420,3530 2430,3520 D8.1 D9.2 2730,3520 2740,3530 C8.1
NetC8_2: C8.2 D10.1 D11.2 | length 538.3
  Top Layer w30: C8.2 3010,3530 3030,3510 D10.1 D11.2
NetC9_2: C9.2 C10.1 D5.1 D6.2 | length 823.4
  Top Layer w30: C9.2 1520,3090 1530,3100 D5.1 D6.2 1830,3110 1850,3090 C10.1
NetC10_2: C10.2 C11.1 D7.1 D8.2 | length 823.4
  Top Layer w30: C10.2 2110,3090 2130,3110 D7.1 D8.2 2430,3100 2440,3090 C11.1
NetC11_2: C11.2 C12.1 D9.1 D10.2 | length 823.4
  Top Layer w30: C11.2 2720,3090 2730,3100 D9.1 D10.2 3030,3110 3050,3090 C12.1
NetC13_2: C13.2 U3.5 | length 158.8
  Top Layer w15: C13.2 530,3040 550,3060 U3.5
NetD2_1: D2.1 R3.2 | length 168.8
  Top Layer w15: R3.2 3308.74,1410 3326.06,1427.32 D2.1
NetD3_1: D3.1 R4.2 | length 141.7
  Top Layer w15: R4.2 735.9,744.57 D3.1
NetD12_1: D12.1 R7.2 | length 215.4
  Top Layer w15: R7.2 618.42,3668.42 631.34,3681.34 D12.1
NetD13_2: D13.2 K1.5 Q1.3 | length 573.5
  Top Layer w15: Q1.3 1370,1800 1390,1780 D13.2 1504.92,1815.36 1504.92,1845.08 1480,1870 K1.5
NetD14_2: D14.2 K2.5 Q2.3 | length 550.5
  Top Layer w15: D14.2 2819.72,2760.28 2862.64,2717.36 2862.64,2677.36 K2.5 3010,2670 3081.55,2598.45 Q2.3
NetQ1_1: Q1.1 R9.1 R11.2 | length 718.6
  Top Layer w15: R11.2 810,1950 853.18,1993.18 R9.1 1050,1810 1096.02,1763.98 Q1.1
NetQ2_1: Q2.1 R10.1 R12.2 | length 325.6
  Top Layer w15: Q2.1 3163.98,2376.02 R12.2 R10.1
NetR2_2: R2.2 U2.3 | length 415.9
  Top Layer w15: R2.2 2690,1530 2785,1625 U2.3
NetR5_1: R5.1 R6.2 U3.7 | length 305.8
  Top Layer w15: U3.7 660,3240 681.84,3261.84 714.84,3261.84 720,3267 R5.1
NetR15_1: R15.1 R17.2 U4.7 | length 312.8
  Top Layer w15: R15.1 R17.2 2025.91,520.35 2043.01,537.46 2043.01,543.37 2085.67,586.02 U4.7
NetR16_1: R16.1 U4.13 | length 424.6
  Top Layer w15: U4.13 2467.2,662.8 2490,640 2490,420 2526.82,383.18 R16.1
OSC_OUT: C5.1 pad.2@100,3270 U3.3 | length 1498.7
  Top Layer w15: v1(910,3540) 919.47,3540 v1@929.47,3530
  Top Layer w30: pad.2@100,3270 100,3230 110,3220 v1(200,3220) 270,3220 300,3190 U3.3 ; v1@929.47,3530 C5.1@1030,3530
  Bottom Layer w30: v1(200,3220) 200,3531.21 208.79,3540 384.09,3540 424.09,3580 694.7,3580 734.7,3540 v1(910,3540)
SCL: J2.4 pad.2@520,100 R13.1 U4.14 | length 3575.4
  Top Layer w15: J2.4 209.84,140.16 250,100 pad.2@520,100 ; U4.14 2511.21,688.39 2520,679.6 2520,610 2536.82,593.18 R13.1 2606.82,600 v1(2720,600)
  Bottom Layer w15: J2.4 365.12,310 2680,310 2720,350 v1(2720,600)
SDA: J2.3 pad.2@550,370 R14.1 U4.15 | length 3574.6
  Top Layer w15: J2.3 321.57,351.57 340,370 pad.2@550,370 ; U4.15 2473.98,713.98 2556.23,796.23 2584.64,796.23 R14.1 2611.59,800 v1(2720,800)
  Bottom Layer w15: J2.3 288.27,430 2560,430 2600,470 2600,770 2630,800 v1(2720,800)
TRI/THR: C14.1 R6.1 U3.2 U3.6 | length 485
  Top Layer w15: U3.2 450,3240 498.18,3191.82 548.18,3191.82 U3.6 717,3190 720,3193 C14.1
ZAP_LOW: K2.3 R8.1 U2.2 | length 634.9
  Top Layer w30: K2.3 2570,1850 2590,1830 R8.1 2700,1710 2735,1675 U2.2
ZAP_ON: pad.2@2290,390 R9.2 U4.5 | length 3350.1
  Top Layer w15: v1(940,2070) R9.2 ; U4.5 2261.21,637.2 2270,628.42 2270,490.53 2280,480.53 2280,400 pad.2@2290,390
  Bottom Layer w15: v1(940,2070) 940,578.79 948.79,570 2261.21,570 2270,561.21 v1(2270,500)
pads on no net: K1.3 R2.MP1 R2.MP2 U1.2 U1.3 U1.5 U2.5 U2.6 U4.9 U4.10 U4.11 U4.12

## Silkscreen, mask and mechanical layers (free items; w line width, h text height)
Top Overlay:
  the board outline again, w0.39
  text "OSC" at 55,3315 h30
  text "HIGH" at 3395,2485 h30
  text "LOW" at 3415,2265 h30
  text "GND" at 385,2085 h30
  text "12V" at 385,1885 h30
  text "GND" at 395,725 h30
  text "C_HIGH" at 1605,720 h30
  text "5V" at 395,535 h30
  text "SDA" at 395,335 h30
  text "ZAP_ON" at 2115,320 h30
  text "RESET" at 2315,285 h30
  text "SCL" at 385,145 h30
  text "C_MEAS" at 1995,120 h30